# EAGLE board CRDC (EAGLE 9.1.3)
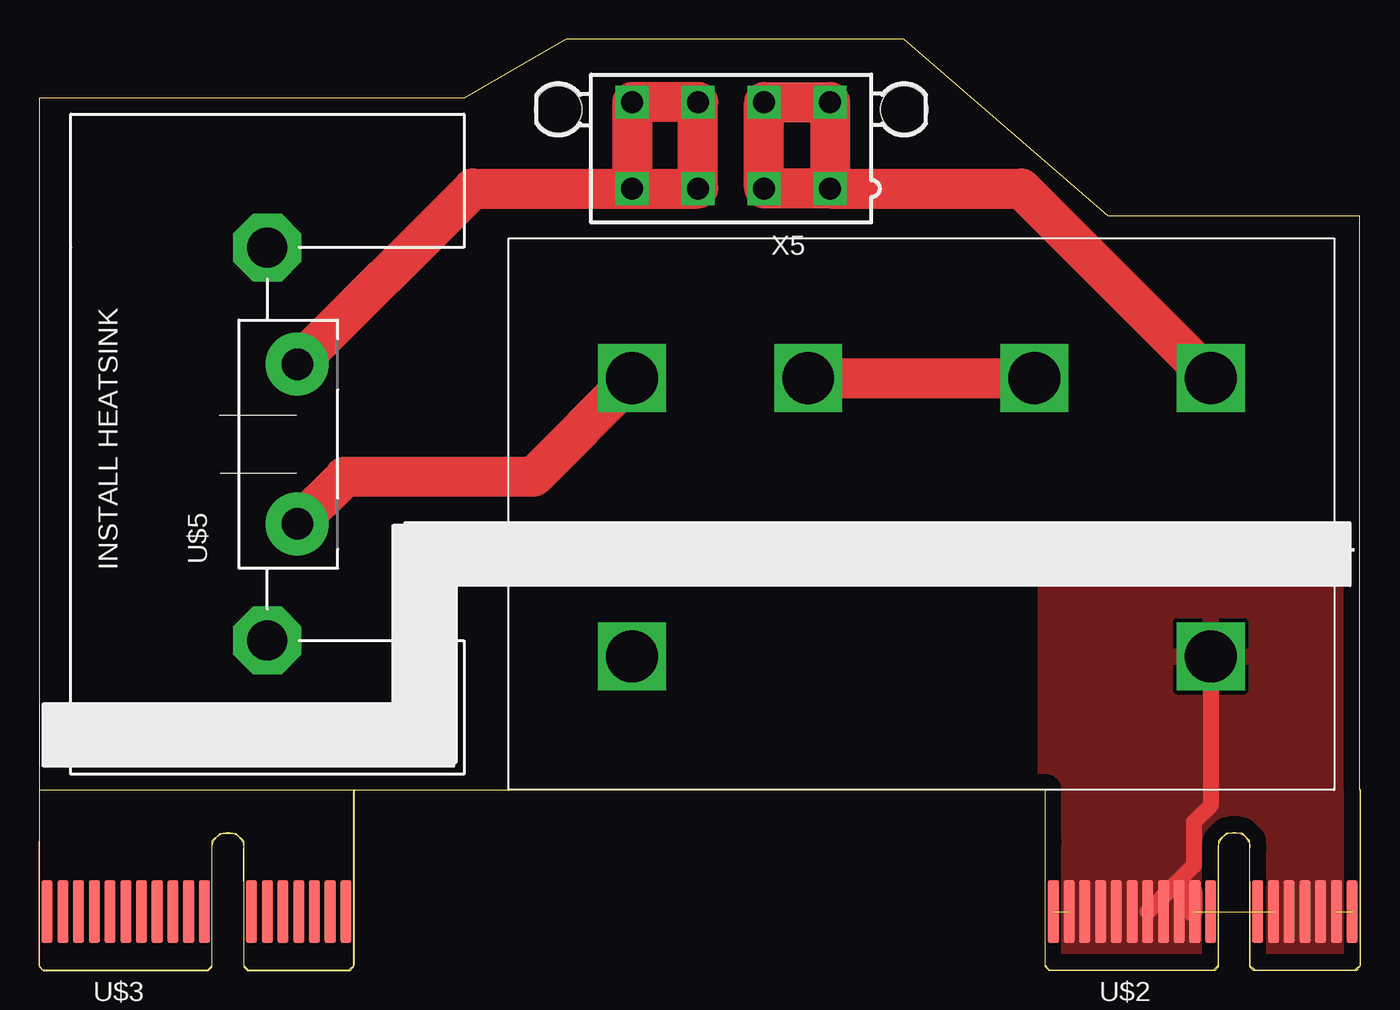
[diagram p0: board, top side]
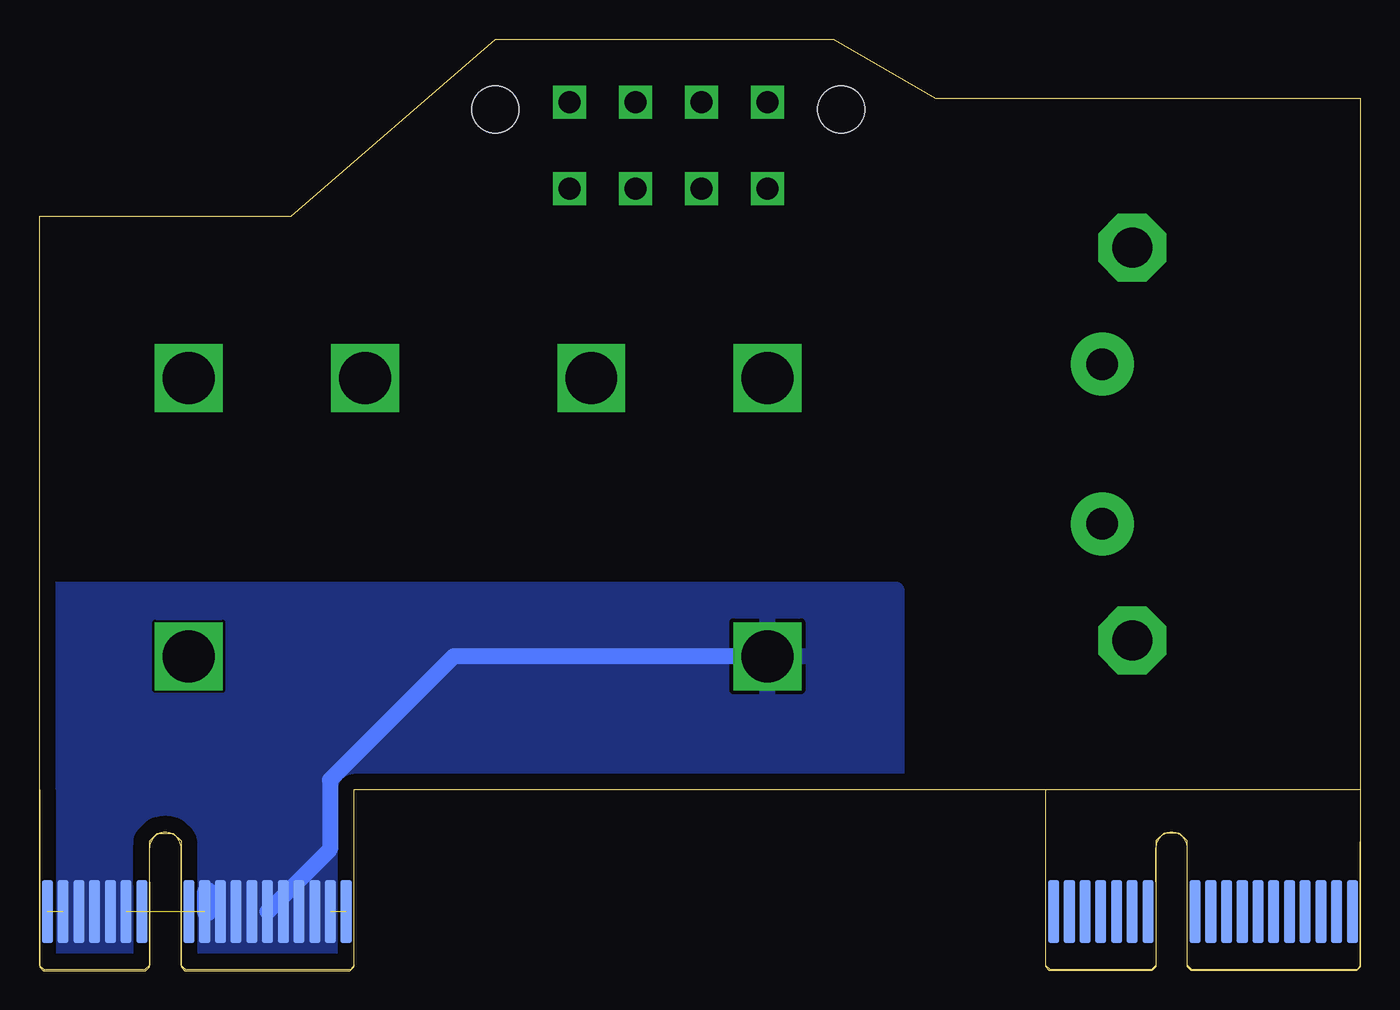
[diagram p1: board, bottom side, seen from below]

Size 84.02 x 59.25 mm. Coordinates in mm from the lower left corner, seen from the top.
Outline: 0.01,11.5 0.01,55.5 27,55.5 33.51,59.25 55.01,59.25 68,48 84,48 84,11.5 84,0.25 83.75,0 77.25,0 77,0.25 77,8.25 76.5,8.75 75.5,8.75 75,8.25 75,0.25 74.75,0 64.25,0 64,0.25 64,11.5 55.51,11.5 30.5,11.5 20,11.5
Outline: 0.01,11.5 20,11.5
Outline: 0.01,11.5 0.01,0.25 0.26,0 10.76,0 11.01,0.25 11.01,8.25 11.51,8.75 12.51,8.75 13.01,8.25 13.01,0.25 13.26,0 19.75,0 20,0.25 20,11.5
Copper layers (1*16): Top 0.035mm / dielectric 1.5mm / Bottom 0.035mm
Design rules "default": minimum track width 6mil, minimum drill 0.35mm, track to track 6mil, track to pad 6mil, pad to pad 6mil, via to via 6mil, smd to smd 6mil, copper to edge 40mil, drill to drill 6mil, minimum pad ring 10mil, minimum via ring 8mil, stop-mask expansion 4mil, vias tented up to drill 0mil, thermal gap 10mil
Net classes: 0 default: width 1 mm, clearance 0.152 mm; 1 LV: clearance 0.001 mm

## Footprints (pad centres in the part's own frame; a part is rotated, then mirrored left to right if it is on the bottom)
G7L = drill 3.3 square: 0 0,0; 1 36.8,0; 2 0,-17.7; 4 11.2,-17.7; 6 25.6,-17.7; 8 36.8,-17.7
PCI-E_SLOT_36 = smd 0.7 x 4 bottom: A1 0.245,3.75; A2 1.245,3.75; A3 2.245,3.75; A4 3.245,3.75; A5 4.245,3.75; A6 5.245,3.75; A7 6.245,3.75; A8 7.245,3.75; A9 8.245,3.75; A10 9.245,3.75; A11 10.245,3.75; A12 13.245,3.75; A13 14.245,3.75; A14 15.245,3.75; A15 16.245,3.75; A16 17.245,3.75; A17 18.245,3.75; A18 19.245,3.75 | smd 0.7 x 4: B1 0.245,3.75; B2 1.245,3.75; B3 2.245,3.75; B4 3.245,3.75; B5 4.245,3.75; B6 5.245,3.75; B7 6.245,3.75; B8 7.245,3.75; B9 8.245,3.75; B10 9.245,3.75; B11 10.245,3.75; B12 13.245,3.75; B13 14.245,3.75; B14 15.245,3.75; B15 16.245,3.75; B16 17.245,3.75; B17 18.245,3.75; B18 19.245,3.75
_CUSTOM_TO-247-2V = drill 2 pad 4: 1 -5.08,-1.905; 2 5.08,-1.905 | drill 2.54 pad 4.318 octagon: P$1 -12.5,0; P$2 12.5,0
5566-8 = drill 1.4 square: 1 6.3,-2.75; 2 2.1,-2.75; 3 -2.1,-2.75; 4 -6.3,-2.75; 5 6.3,2.75; 6 2.1,2.75; 7 -2.1,2.75; 8 -6.3,2.75 | hole 3: 11,2.29; -11,2.29

## Placement (x,y rotation side)
U$1  G7L  [G7L]  74.5,20 180 top
U$2  PCIE-36-EDGE  [PCI-E_SLOT_36]  64.25,0 0 top
U$3  PCIE-36-EDGE  [PCI-E_SLOT_36]  0.26,0 0 top
U$5  TO247RESISTORHEATINK  [_CUSTOM_TO-247-2V]  14.51,33.5 90 top
X5  5566-8  [5566-8]  44.01,52.5 0 top

## Library data of the parts
U$1-U$3 = ACC-MB-R0
U$5 = ACC-MB-R0; PACKAGE: TO-247
X5 = con-molex; MF: MOLEX; OC_FARNELL: unknown; OC_NEWARK: unknown

## Nets
HV+_WET: U$5.2 X5.3 X5.4 X5.7 X5.8
N$1: U$1.1 U$2.A1 U$2.A2 U$2.A3 U$2.A4 U$2.A5 U$2.A6 U$2.A7 U$2.A8 U$2.A9 U$2.A10 U$2.A11 U$2.A12 U$2.A13 U$2.A14 U$2.A15 U$2.A16 U$2.A17 U$2.A18
N$2: U$1.0 U$2.B1 U$2.B2 U$2.B3 U$2.B4 U$2.B5 U$2.B6 U$2.B7 U$2.B8 U$2.B9 U$2.B10 U$2.B11 U$2.B12 U$2.B13 U$2.B14 U$2.B15 U$2.B16 U$2.B17 U$2.B18
N$21: U$1.8 U$5.1
N$23: U$1.4 U$1.6
V+ [LV]: U$1.2 X5.1 X5.2 X5.5 X5.6

## Tracks (layer width: path | path; a pad name or v marks a point on that pad's centre or on a via)
HV+_WET
  Top 2.54: U$5.2 27.58,49.75 X5.4 | X5.4 X5.3 X5.7 X5.8 X5.4
N$1  (5 unrouted)
  Bottom 1.016: U$2.A6 65.53,7.72 65.53,12.13 57.66,20 U$1.1
  Bottom 1.27: 73.35,3.75 73.35,4.97 73.31,5
  pour Bottom: 29.5,24.25 29.5,11.5 64,11.5 64,0 84.25,0 84.25,24.25
N$2  (5 unrouted)
  Top 1.016: U$2.B7 73.44,6.69 73.44,9.47 74.5,10.53 U$1.0
  Top 1.27: 73.31,5 73.35,4.97 73.35,3.75
  pour Top: 64,24.25 64,11.5 64,0 84,0 84,24.25
N$21
  Top 2.54: 16.49,28.5 U$5.1 19.41,31.42 31.43,31.42 U$1.8
N$23
  Top 2.54: U$1.6 U$1.4
V+
  Top 2.54: X5.1 62.46,49.75 U$1.2 | X5.1 X5.2 X5.6 X5.5 X5.1